# Altium PCB VFD.PcbDoc
Units mil, origin at the board's own origin, x right, y up, seen from the top; angles counter-clockwise.
Board outline 2676 x 2037 mil, 2 copper layers (Top Layer, Bottom Layer); 84 components, 86 nets, 344 pads, 273 vias.
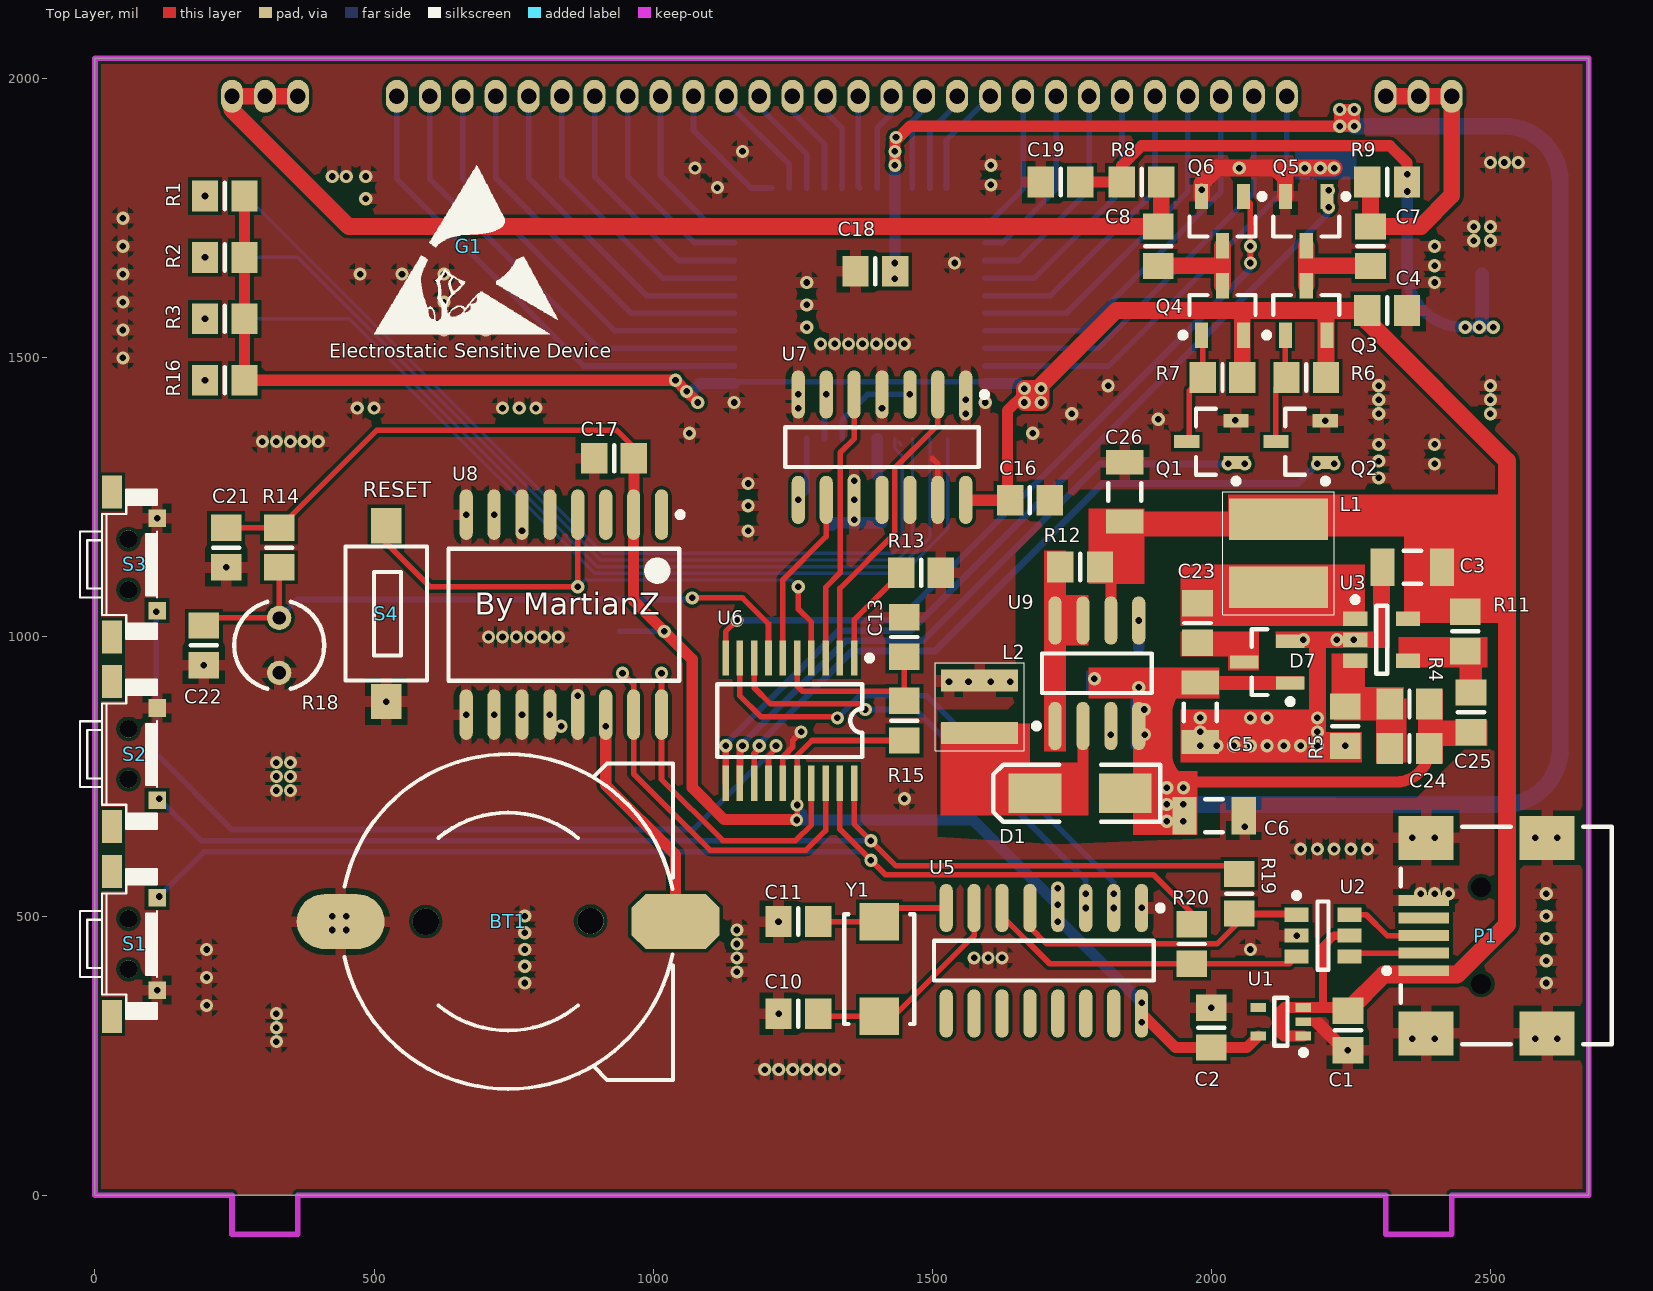
[diagram p0: Top Layer view]
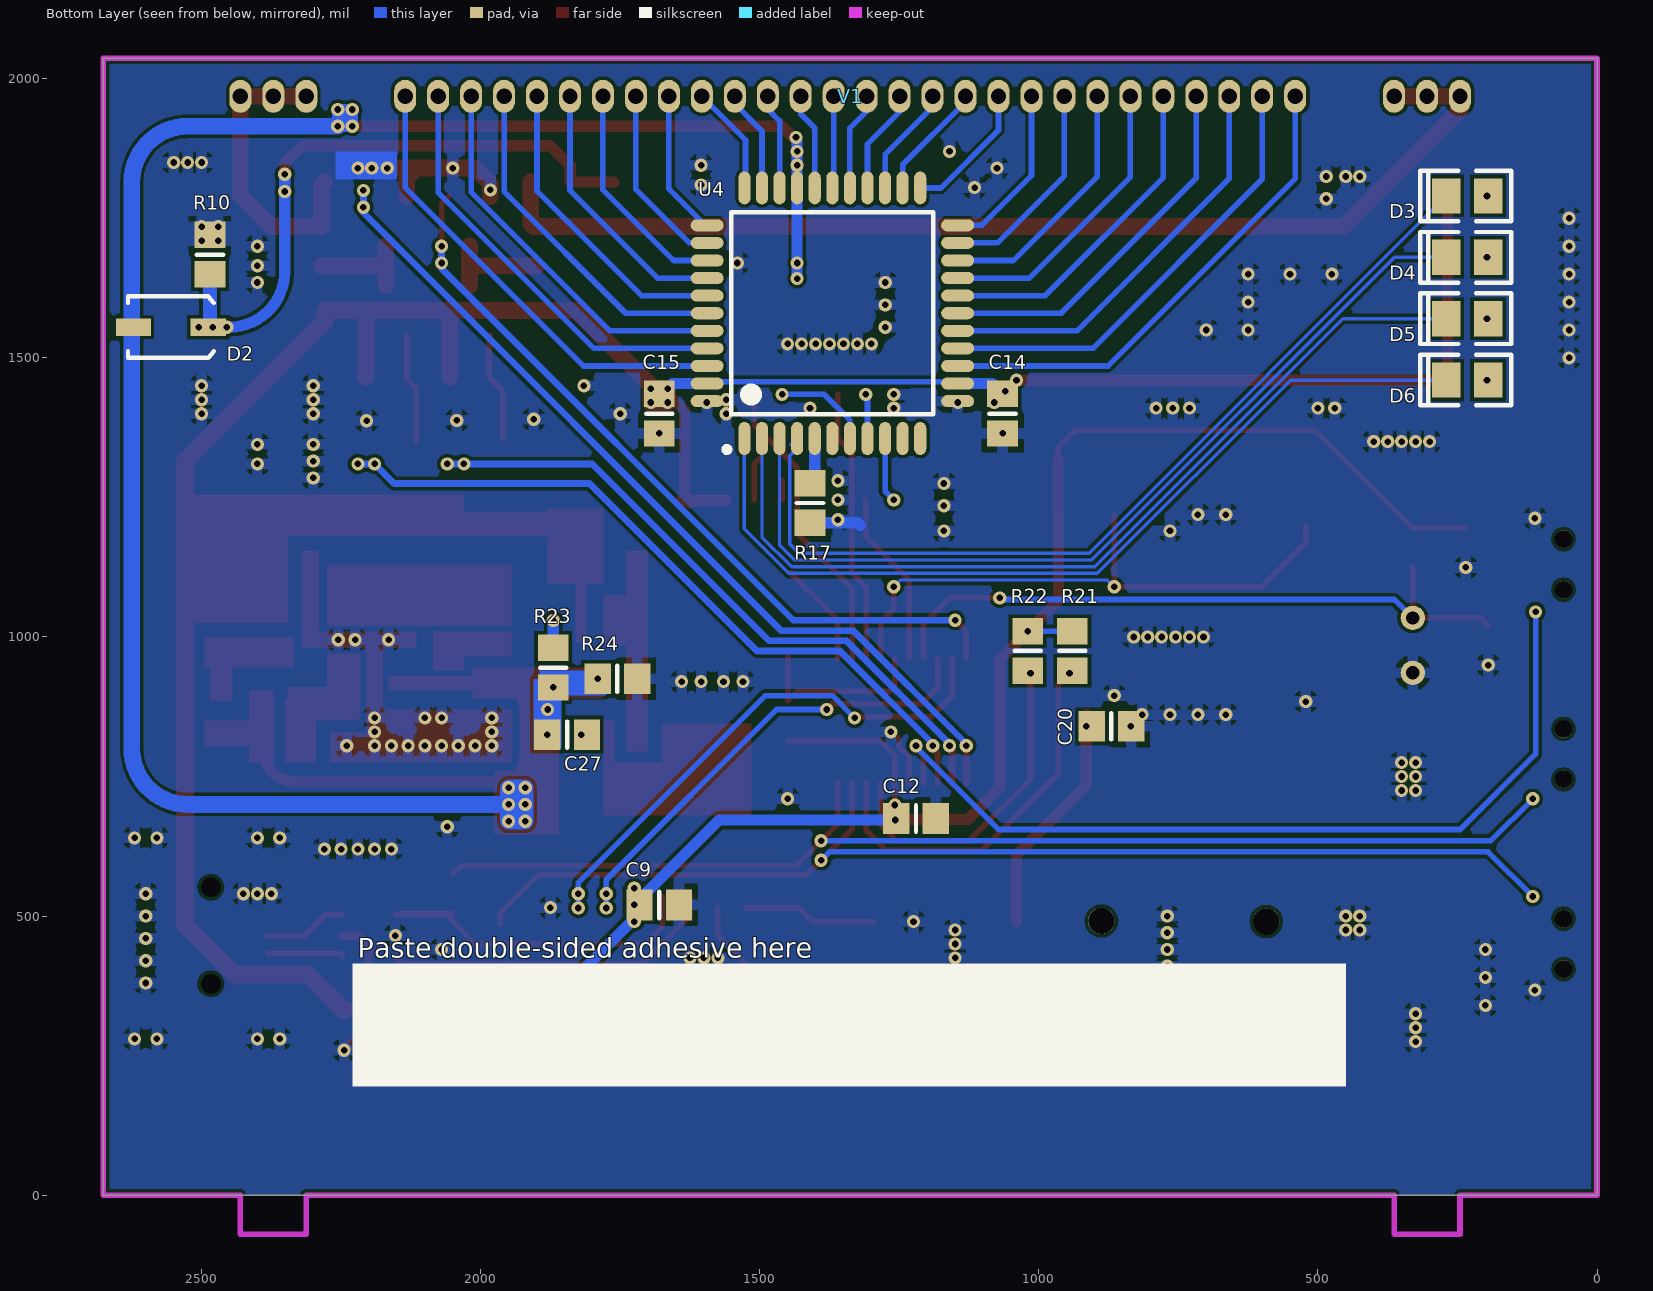
[diagram p1: Bottom Layer view, seen from below]

## Layer stack, top to bottom
Top Solder: solder mask 0.4, Solder Resist, Dk 3.5
Top Layer: signal copper 1.4
Dielectric 1: dielectric 12.6, FR-4, Dk 4.8
Bottom Layer: signal copper 1.4
Bottom Solder: solder mask 0.4, Solder Resist, Dk 3.5

## Board outline
0,0 2676,0 2676,2037 0,2037

## Design rules (kind name [scope] priority, off if disabled: settings)
Clearance [All] p1: gap=6
HoleSize [All] p1: absolutevalues=TRUE maxlimit=200 minlimit=1 maxpercent=80.000 minpercent=20.000
HoleToHoleClearance [All] p1: gap=3 allowstackedmicrovias=TRUE
MinimumSolderMaskSliver [All] p1: minsoldermaskwidth=1
MinimumSolderMaskSliver SilkscreenOverComponentPads [All] p2: minsoldermaskwidth=10
PlaneConnect [All] p1: planeconnectstyle=Relief reliefexpansion=20 reliefentries=4 reliefconductorwidth=20 reliefairgap=10
PolygonConnect [All] p1: connectstyle=Relief reliefconductorwidth=20 reliefentries=4 polygonreliefangle="90 Angle" airgapwidth=10
RoutingVias [All] p1: holewidth=28 width=50 viastyle="Through Hole" minholewidth=28 minwidth=50 maxholewidth=28 maxwidth=50
SilkToBoardRegionClearance [All] p1 off:
SilkToSilkClearance [All] p1: silktosilkclearance=0
SilkToSolderMaskClearance [IsPad] p1: minsilkscreentomaskgap=0 clearancetoexposedcopper=TRUE
SolderMaskExpansion [All] p1: expansion=4
UnpouredPolygon [All] p1: allowunpoured=FALSE
Width [All] p1: maxlimit=100 minlimit=6 preferedwidth=10
22 further rules are at their usual default settings.

## Classes and differential pairs
component class vfd_mcu: BT1 C9 C10 C11 C12 C13 C17 C18 C19 C20 C21 C22 R13 R14 R15 R18 R19 R20 R21 R22 S1 S2 S3 S4 U5 U6 U8 Y1
component class vfd_power: C1 C2 C3 C4 C5 C6 C7 C8 C23 C24 C25 C26 C27 D1 D2 D7 G1 L1 L2 P1 Q1 Q2 Q3 Q4 Q5 Q6 R4 R5 R6 R7 R8 R9 R10 R11 R12 R23 R24 U1 U2 U3 U9
component class vfd_pt6315: C14 C15 C16 D3 D4 D5 D6 R1 R2 R3 R16 R17 U4 U7 V1

## Components (designator, comment, footprint, x,y, rotation, side; value= is the part's Value field where it differs from the comment)
BT1 "Battery Holder" BAT 1040,490 r270 top
C1 "0805" 6-0805_N 2244.65,295.16 r90 top
C2 "0805" 6-0805_N 2000,300 r270 top
C3 "1206/6.3V" C1206 2360,1125 r0 top
C4 "0805" 6-0805_N 2315,1585 r180 top
C5 "1206/50V" C1206 1980,865 r270 top
C6 "1206/50V" C1206 2005,680 r0 top
C7 "0805" 6-0805_N 2285,1700 r270 top
C8 "0805" 6-0805_N 1905,1700 r270 top
C9 "0805" 6-0805_N 1680,520 r0 bottom
C10 "0805" 6-0805_N 1260,325 r0 top
C11 "0805" 6-0805_N 1260,490 r0 top
C12 "0805" 6-0805_N 1220,675 r0 bottom
C13 "0805" 6-0805_N 1450,1000 r270 top
C14 "0805" 6-0805_N 1065,1400 r90 bottom
C15 "0805" 6-0805_N 1680,1400 r90 bottom
C16 "0805" 6-0805_N 1675,1245 r180 top
C17 "0805" 6-0805_N 930,1320 r180 top
C18 "0805" 6-0805_N 1398,1655 r0 top
C19 "0805" 6-0805_N 1730,1815 r0 top
C20 "0805" 6-0805_N 870,840 r0 bottom
C21 "0805" 6-0805_N 235,1160 r90 top
C22 "0805" 6-0805_N 195,985 r90 top
C23 "0805" 6-0805_N 1975,1025 r90 top
C24 "0805" 6-0805_N 2355,800 r180 top
C25 "0805" 6-0805_N 2465,865 r270 top
C26 "1206/6.3V" C1206 1845,1260 r270 top
C27 "0805" 6-0805_N 1845,825 r0 bottom
D1 "SS36" SMA 1765,720 r180 top
D2 "MMSZ5231B" SOD-123 2555,1555 r180 bottom
D3 "0805-LED" "SMD _LED" 232.5,1790 r180 bottom
D4 "0805-LED" "SMD _LED" 232.5,1680 r180 bottom
D5 "0805-LED" "SMD _LED" 232.5,1570 r180 bottom
D6 "0805-LED" "SMD _LED" 232.5,1460 r180 bottom
D7 "BAT54S" SOT23_N 2100,955 r180 top
G1 "ESD Label" ESD 670,1700 r0 top
L1 "GDCD4532" GDCD4532 2120,1150 r270 top
L2 "GDCD3521" GDCD3521 1585,875 r270 top
P1 "MINI_USB_SM" USB/SM0.8-6H5 2690,465 r0 top
Q1 "2N7002" SOT-23 2000,1350 r180 top
Q2 "2N7002" SOT-23 2160,1350 r180 top
Q3 "SI2301" SOT-23 2170,1585 r90 top
Q4 "SI2301" SOT-23 2020,1585 r90 top
Q5 "SI2302" SOT-23 2170,1745 r270 top
Q6 "SI2302" SOT-23 2020,1745 r270 top
R1 "0805" 6-0805_N 232.5,1790 r0 top
R2 "0805" 6-0805_N 232.5,1680 r0 top
R3 "0805" 6-0805_N 232.5,1570 r0 top
R4 "0805" 6-0805_N 2355,880 r180 top
R5 "0805" 6-0805_N 2240,840 r90 top
R6 "0805" 6-0805_N 2170,1465 r180 top
R7 "0805" 6-0805_N 2020,1465 r0 top
R8 "0805" 6-0805_N 1875,1815 r180 top
R9 "0805" 6-0805_N 2315,1815 r0 top
R10 "0805" 6-0805_N 2485,1685 r270 bottom
R11 "0805" 6-0805_N 2455,1010 r270 top
R12 "0805" 6-0805_N 1765,1125.51 r180 top
R13 "0805" 6-0805_N 1480,1115 r180 top
R14 "0805" 6-0805_N 330,1160 r270 top
R15 "0805" 6-0805_N 1450,850 r90 top
R16 "0805" 6-0805_N 232.5,1460 r0 top
R17 "0805" 6-0805_N 1410,1240 r90 bottom
R18 "R4MM" R4MM 330,985 r270 top
R19 "0805" 6-0805_N 2050,540 r90 top
R20 "0805" 6-0805_N 1965,450 r90 top
R21 "0805" 6-0805_N 940,975 r90 bottom
R22 "0805" 6-0805_N 1020,975 r90 bottom
R23 "0805" 6-0805_N 1870,945 r270 bottom
R24 "0805" 6-0805_N 1755,925 r180 bottom
S1 "SW-SIDE" SW_SIDE 60,450 r90 top
S2 "SW-SIDE" SW_SIDE 60,790 r90 top
S3 "SW-SIDE" SW_SIDE 60,1130 r90 top
S4 "SW-PB" aj3X6 640,1120 r270 top
U1 "MIC5365-3.3YC5" SC70-5_N 2124.65,310.59 r180 top
U2 "USBLC6-2SC6" SOT-23_A_N 2200,465 r0 top
U3 "LT1931AES5" S5-T_N 2305,995 r0 top
U4 "PT6315" LQFP44_10X10X08P 1370,1580 r90 bottom
U5 "CH340G" SOP-16_N 1700,420 r270 top
U6 "STM32F030F4P6" TSSOP20 1245,850 r180 top
U7 "SN74LVC125AD" D014_N 1410,1340 r270 top
U8 "DS3231S(N)" WSO16_N 840,1040 r270 top
U9 "MC34063AD" 751-02_N 1795,935 r90 top
V1 "VFD" VFD48-1202FN 1338,945 r180 bottom locked
Y1 "5032" 4SMX 1405,405 r270 top

## Footprints (in the part's own frame and the unit in brackets; to place one, negate y for a bottom-side part, rotate by r counter-clockwise, add the part's x,y. Pads: shape width x height; smd on the part's side, far side on the other; paste and mask are expansions set on the pad)
4SMX [mm] "Quartz Crystal, SM; Body 5.2 x 3.4 mm (LxW max)"
  rect 1.7x1.8 smd: 1(-2.15,0) 2(2.15,0)
  silkscreen extent -2.5,-1.6 2.5,1.6
6-0805_N [mm] "Chip Resistor, Body 2.0x1.2mm, IPC Medium Density"
  rect 1.2x1.4 smd: 1(-0.9,0) 2(0.9,0)
  silkscreen extent 0,-0.6 0,0.6, body extent -1.07,-0.7 1.07,0.7, height 0.7
751-02_N [mm] "SOIC, 8-Leads, Body 4.9x3.9mm, Pitch 1.27mm, IPC Medium Density"
  oval 2.2x0.6 smd: 1(-2.4,1.905) 2(-2.4,0.635) 3(-2.4,-0.635) 4(-2.4,-1.905) 5(2.4,-1.905) 6(2.4,-0.635) 7(2.4,0.635) 8(2.4,1.905)
  silkscreen extent -2.52,-2.5 0.9,2.88, body extent -1.95,-2.45 1.95,2.45, height 1.75
aj3X6 [mm]
  rect 1.6x1.4 smd: 1(-2.012,-3.002) 2(5.988,-3.002)
  silkscreen extent -1.06,-4.85 5.04,-1.15
BAT [mm]
  oct 2.5x4 smd: 1(-0.002,0.005)
  oval 2.5x4 smd: 2(-0.002,-15.235)
  round 1.2 hole 1.2 unplated: ""(-0.027,-3.865) ""(-0.002,-11.365)
  silkscreen extent -7.62,-15.07 7.62,-0.11, body extent -6.94,-14.35 7,-0.38, height 1
C1206 [mm] "Chip Capacitor, Body 3.2x1.6mm, IPC High Density"
  rect 1.1x1.7 smd: 1(-1.35,0) 2(1.35,0)
  silkscreen extent -0.4,-0.75 0.4,0.75, body extent -1.7,-0.9 1.7,0.9, height 1.3
D014_N [mm] "SOIC, 14-Leads, Body 8.7x3.9mm, Pitch 1.27mm, IPC Medium Density"
  oval 2.2x0.6 smd: 1(-2.4,3.81) 2(-2.4,2.54) 3(-2.4,1.27) 4(-2.4,0) 5(-2.4,-1.27) 6(-2.4,-2.54) 7(-2.4,-3.81) 8(2.4,-3.81) 9(2.4,-2.54) 10(2.4,-1.27) 11(2.4,0) 12(2.4,1.27) 13(2.4,2.54) 14(2.4,3.81)
  silkscreen extent -2.52,-4.4 0.9,4.79, body extent -2,-4.38 2,4.38, height 1.75
ESD [mil]
  silkscreen extent -170,-157 159,145
GDCD3521 [mm]
  rect 1x3.5 smd: 1(-1.2,0) 2(1.2,0)
  silkscreen extent -2,-2.03 2,2.03
GDCD4532 [mm]
  rect 1.9x4.5 smd: 1(-1.55,0) 2(1.55,0)
  silkscreen extent -2.79,-2.54 2.79,2.54
LQFP44_10X10X08P [mm]
  oval 1.5x0.55 smd: 1(-5.7,4) 2(-5.7,3.2) 3(-5.7,2.4) 4(-5.7,1.6) 5(-5.7,0.8) 6(-5.7,0) 7(-5.7,-0.8) 8(-5.7,-1.6) 9(-5.7,-2.4) 10(-5.7,-3.2) 11(-5.7,-4) 23(5.7,-4) 24(5.7,-3.2) 25(5.7,-2.4) 26(5.7,-1.6) 27(5.7,-0.8) 28(5.7,0) 29(5.7,0.8) 30(5.7,1.6) 31(5.7,2.4) 32(5.7,3.2) 33(5.7,4)
  oval 0.55x1.5 smd: 12(-4,-5.7) 13(-3.2,-5.7) 14(-2.4,-5.7) 15(-1.6,-5.7) 16(-0.8,-5.7) 17(0,-5.7) 18(0.8,-5.7) 19(1.6,-5.7) 20(2.4,-5.7) 21(3.2,-5.7) 22(4,-5.7) 34(4,5.7) 35(3.2,5.7) 36(2.4,5.7) 37(1.6,5.7) 38(0.8,5.7) 39(0,5.7) 40(-0.8,5.7) 41(-1.6,5.7) 42(-2.4,5.7) 43(-3.2,5.7) 44(-4,5.7)
  silkscreen extent -6.32,-4.6 4.6,4.93
R4MM [mm]
  round 1.1 hole 0.6: 1(-1.25,0) 2(1.25,0)
  silkscreen extent -1.98,-2.05 1.98,2.05
S5-T_N [mm] "SOT23, 5-Leads, Body 3x1.6mm, Pitch 0.95mm, Lead Span 2.8mm, IPC Medium Density"
  rect 1.1x0.65 smd: 1(-1.2,0.95) 2(-1.2,0) 3(-1.2,-0.95) 4(1.2,-0.95) 5(1.2,0.95)
  silkscreen extent -1.32,-1.55 0.25,1.95, body extent -0.9,-1.55 0.9,1.55, height 1
SC70-5_N [mm] "SOT353, 5-Leads, Body 2x1.3mm, Pitch 0.65mm, Lead Span 2.1mm, IPC Medium Density"
  rect 0.7x0.4 smd: 1(-1.025,0.65) 2(-1.025,0) 3(-1.025,-0.65) 4(1.025,-0.65) 5(1.025,0.65)
  silkscreen extent -1.15,-1.1 0.3,1.52, body extent -0.7,-1.1 0.7,1.1, height 1.1
SMA [mm] "DO-214-AC/SMA; 2 C-Bend Leads; Body 5 x 2.7 mm, inc. leads (LxW)"
  rect 2.4x1.8 smd: 1(-2.05,0) 2(2.05,0)
  silkscreen extent -3.65,-1.3 3.95,1.3
"SMD _LED" [mm]
  rect 1.3x1.6 smd: 1(0.948,0.006) 2(-0.952,0.006)
  silkscreen extent -2.13,-1.14 2,1.16, body extent -1.52,-0.64 1.52,0.64, height 1.27
SOD-123 [mm] "SOD-123; 2 Leads; Body 2.7 x 1.6 mm, (LxW)"
  rect 1.6x0.8 smd: 1(-1.7,0) 2(1.7,0)
  silkscreen extent -1.95,-1.4 1.95,1.4
SOP-16_N [mm] "16-Pin Small Outline Integrated Circuit 1.27 mm Pitch, IPC Medium Density"
  oval 2.2x0.6 smd: 1(-2.4,4.445) 2(-2.4,3.175) 3(-2.4,1.905) 4(-2.4,0.635) 5(-2.4,-0.635) 6(-2.4,-1.905) 7(-2.4,-3.175) 8(-2.4,-4.445) 9(2.4,-4.445) 10(2.4,-3.175) 11(2.4,-1.905) 12(2.4,-0.635) 13(2.4,0.635) 14(2.4,1.905) 15(2.4,3.175) 16(2.4,4.445)
  silkscreen extent -2.52,-5 0.9,5.42, body extent -1.95,-4.95 1.95,4.95, height 1.5
SOT23_N [mm] "SOT23, 3-Leads, Body 2.9x1.3mm, Pitch 0.95mm, Lead Span 2.3mm, IPC Medium Density"
  rect 1.3x0.6 smd: 1(-1.05,0.95) 2(-1.05,-0.95) 3(1.05,0)
  silkscreen extent -1.18,-1.5 0.7,1.92, body extent -0.7,-1.5 0.7,1.5, height 1.1
SOT-23 [mm] "SOT23, 3-Leads, Body 2.9x1.3mm, Pitch 0.95mm, Lead Span 2.4mm, IPC Medium Density"
  rect 1.15x0.6 smd: 1(-1.125,0.95) 2(-1.125,-0.95) 3(1.125,0)
  silkscreen extent -1.25,-1.5 0.7,1.92, body extent -0.7,-1.5 0.7,1.5, height 1.14
SOT-23_A_N [mm] "SOT23, 6-Leads, Body 2.9x1.7mm, Pitch 0.95mm, Lead Span 2.8mm, IPC Medium Density"
  rect 1.1x0.65 smd: 1(-1.2,0.95) 2(-1.2,0) 3(-1.2,-0.95) 4(1.2,-0.95) 5(1.2,0) 6(1.2,0.95)
  silkscreen extent -1.32,-1.55 0.25,1.95, body extent -0.9,-1.55 0.9,1.55, height 1.45
SW_SIDE [mm]
  round 0.8 hole 0.8 unplated: 0(-1.15,0) 0(1.15,0)
  rect 0.8x0.8 smd: 1(-2.1,-1.3) 2(2.1,-1.3)
  rect 1.5x0.9 smd: 3(-3.3,0.75) 4(3.3,0.75)
  silkscreen extent -3.42,-1.3 3.42,2.2
TSSOP20 [mm] "Shrink Small Outline; 20 Leads; Body Width 4.4 mm; Pitch 0.65 mm"
  rect 0.3x1.6 smd: 1(-2.925,-2.85) 2(-2.275,-2.85) 3(-1.625,-2.85) 4(-0.975,-2.85) 5(-0.325,-2.85) 6(0.325,-2.85) 7(0.975,-2.85) 8(1.625,-2.85) 9(2.275,-2.85) 10(2.925,-2.85) 11(2.925,2.85) 12(2.275,2.85) 13(1.625,2.85) 14(0.975,2.85) 15(0.325,2.85) 16(-0.325,2.85) 17(-0.975,2.85) 18(-1.625,2.85) 19(-2.275,2.85) 20(-2.925,2.85)
  silkscreen extent -3.75,-2.97 3.3,1.65
USB/SM0.8-6H5 [mm] "Connector; USB2.0, Type B, SM; 5 Position; Right Angle"
  rect 2.3x0.5 smd: 1(-7.85,-1.6) 2(-7.85,-0.8) 3(-7.85,0) 4(-7.85,0.8) 5(-7.85,1.6)
  rect 2.5x2 smd: 6(-7.75,4.45) 7(-2.25,4.45) 8(-7.75,-4.45) 9(-2.25,-4.45)
  round 0.6 hole 0.9 unplated: MH1(-5.25,2.2) MH2(-5.25,-2.2)
  silkscreen extent -9.67,-4.95 0.7,4.95, body extent -8.9,-4.95 0.7,4.95, height 3.9
VFD48-1202FN [mm]
  oval 1x1.5 hole 0.7: 1(-27.75,26) 2(-26.25,26) 3(-24.75,26) 4(-20.25,26) 5(-18.75,26) 6(-17.25,26) 7(-15.75,26) 8(-14.25,26) 9(-12.75,26) 10(-11.25,26) 11(-9.75,26) 12(-8.25,26) 13(-6.75,26) 14(-5.25,26) 15(-3.75,26) 16(-2.25,26) 17(-0.75,26) 18(0.75,26) 19(2.25,26) 20(3.75,26) 21(5.25,26) 22(6.75,26) 23(8.25,26) 24(9.75,26) 25(11.25,26) 26(12.75,26) 27(14.25,26) 28(15.75,26) 29(17.25,26) 30(18.75,26) 31(20.25,26) 32(24.75,26) 33(26.25,26) 34(27.75,26)
  body extent -34,-24 34,24, height 20
WSO16_N [mm] "SOIC, 16-Leads, Body 10.3x7.5mm, Pitch 1.27mm, IPC Medium Density"
  oval 2.3x0.6 smd: 1(-4.55,4.445) 2(-4.55,3.175) 3(-4.55,1.905) 4(-4.55,0.635) 5(-4.55,-0.635) 6(-4.55,-1.905) 7(-4.55,-3.175) 8(-4.55,-4.445) 9(4.55,-4.445) 10(4.55,-3.175) 11(4.55,-1.905) 12(4.55,-0.635) 13(4.55,0.635) 14(4.55,1.905) 15(4.55,3.175) 16(4.55,4.445)
  silkscreen extent -4.67,-5.25 3,5.42, body extent -3.75,-5.15 3.75,5.15, height 2.65

## Part data
BT1: library part Battery, "Multicell Battery"
C1 C2 C3 C4 C5 C6 C7 C8 C10 C11 C13 C17 C23 C24 C25 C26 C27: library part Cap, "Capacitor"
C9 C12 C14 C15 C16 C18 C19 C20 C21 C22: library part CAP, "Capacitor"
D1: library part "D Schottky", "Schottky Diode"
D2: library part "D Zener", "Zener Diode"
D3 D4 D5 D6: library part HSMX-C670_1, "Typical RED GaAs SMD LED Agilent make"
D7: "Schottky Barrier Double Diode"
G1: library part g固定过孔
L1 L2: library part Inductor, "Inductor"
Q1 Q2: "N-channel Enhancement Mode Field-effect Transistor"
Q3 Q4: library part PMOS-2, "P-Channel Power MOSFET"
Q5 Q6: library part NMOS-2, "N-Channel Power MOSFET"
R1 R2 R3 R4 R5 R6 R7 R8 R9 R10 R11 R12 R13 R15 R16 R17 R21 R22 R23 R24: library part Res1, "Resistor"
R14 R18 R19 R20: library part res1, "Resistor"
S1 S2 S3: library part SW-PB, "Switch"
S4: "Switch"
U1: library part LP2985AIM5-3.3/NOPB, "Micropower 150 mA Low-Noise Ultra Low-Dropout Regulator, 5-pin SOT-323, Pb-Free"
U2: library part Component_1
U3: "2.2MHz Inverting Current Mode DC/DC Converter"
U7: "Quadruple Bus Buffer Gate with 3-State Outputs"
U8: library part DS3231
U9: "DC-to-DC Converter Control Circuit"
V1: library part VFD48-1202FN, "VFD48-1202FN"
Y1: library part XTAL, "Crystal Oscillator"

## Via types
v1: diameter 23.62, hole 11.81, Top Layer to Bottom Layer, tented both sides, 273 vias

## Nets (pads, with @x,y where several pads share a name; then routed paths per layer and width w, separated by ;. In a path a pad name is that pad's centre, name@x,y a point inside that pad or via, vN(x,y) a via of type N, cw(c..) or ccw(c..) an arc to the next point about the centre after c; other vN are vias at no path point)
3.3V: C2.2 C9.2 C12.2 C17.1 C21.2 R14.1 R15.1 R21.2 R22.2 U1.5 U5.4 U5.16 U6.16 U8.2 | length 3165.5
  Top Layer w10: C21.2 R14.1 504.57,1370 935,1370 965.43,1339.57 C17.1 ; v1@1257.8,672.8 v1(1257.8,699) U6.16 1257.8,787.8 1284.57,814.57 R15.1
  Top Layer w20: C17.1 965.43,1219.57 U8.2 965,1065 1070,960 1070,730 1127.2,672.8 v1@1257.8,672.8 ; U5.16 1935.95,264.57 C2.2 2063.86,264.57 U1.5
  Bottom Layer w10: R21.2 R22.2
  Bottom Layer w20: v1(1257,672) 1573,672 v1(1725,520) ; C12.2@1259,675 C12.2@1266.8,682.8 ; v1(1725,550) v1(1725,520) ; v1(1875,310) v1(1875,345) 1725,495 v1(1725,520)
  other v1: 1725,490 1020,1010
5V: C1.2 C3.2 C4.2 C14.2 C15.2 C16.2 C26.2 L1.1 P1.1 Q3.2 Q4.2 R1.2 R2.2 R3.2 R6.1 R7.2 R11.1 R12.1 R16.2 U1.1 U1.3 U2.5 U3.5 U4.13 U4.43 U7.14 U9.6 | length 5018
  Top Layer w15: 2200,336.18 2200,445 2220,465 U2.5
  Top Layer w20: R16.2@260,1460 v1(1040,1460) v1(1060,1440) v1(1080,1420) ; R16.2 R3.2 R2.2 R1.2 ; U7.14 1560.51,1245 C16.2@1630,1245 ; C16.2@1625,1240 C16.2@1630,1245 ; C16.2 C16.2@1630,1245 ; v1@1665,1435.43 1635,1405.43 1635,1250 C16.2@1630,1245 ; U1.1 2130,285 2125,290 2125,320 2120,325 2131.18,336.18 U1.3 2200,336.18 2239.06,336.18 C1.2
  Top Layer w30: 1680,1435.43 v1@1689.57,1445 ; R7.2 2055.43,1584.57 ; R6.1 2205.43,1580.43 2210,1585 ; C4.2@2279.57,1565.43 C4.2 2210,1585 ; v1@1689.57,1445 v1(1695,1445) ; v1@1689.57,1445 v1(1665,1445) 1665,1435.43 v1(1665,1420) v1(1695,1420) v1(1695,1445) ; v1@1689.57,1445 v1@1692.28,1447.72 ; v1@1692.28,1447.72 1829.57,1585 2125,1585 2210,1585 ; v1@1692.28,1447.72 v1(1695,1445)
  Top Layer w32: C1.2 2309.05,395 2440,395 2530,485 2530,1315 C4.2@2279.57,1565.43
  Bottom Layer w10: U4.13@1145.59,1457.3 1594.41,1457.3 U4.43 ; C15.2@1655.98,1454.02 v1(1665,1445)
  Bottom Layer w20: C14.2 1083.58,1454.02 U4.13 ; U4.43 C15.2@1655.98,1454.02
32KHZ: U8.1
6315_DOUT: U4.6
-20V: C19.2 D2.2 R8.2 R9.2 R10.2 | length 1146.4
  Top Layer w20: C19.2@1761.43,1814 1762.43,1815 R8.2 1839.57,1844.57 1875,1880 2320,1880 2350.43,1849.57 R9.2
  Bottom Layer w20: v1(2351,1829) v1(2351,1798) 2351,1655 ccw(c2451,1655) 2451,1555 v1(2455,1555) v1(2480,1555) D2.2
  Bottom Layer w25: v1(2480,1555) ccw(c2480,1560) 2485,1560 R10.2
  other v1: 2505,1555
-25V: C5.1 C6.1 C18.2 C24.1 C25.2 C27.2 D1.1 D2.1 D7.1 R4.1 R23.2 R24.1 U4.30 U9.4 | length 4753.8
  Top Layer w10: C5.1@1963.15,918.15 C5.1 ccw(c1980,863.15) 1925,863.15 1925,790 ccw(c1975,790) 1975,740
  Top Layer w20: v1(1432.99,1845) 1432.99,1887.99 1460,1915 v1(2230,1915) ; 1975,740 2330.43,740 ccw(c2330.43,800) C24.1 ; v1(2230,1915) v1(2255.94,1915) ; v1(2230,1915) v1(2230,1945) ; v1(2230,1945) 2241.1,1932.17 2244.84,1927.83 v1(2255.94,1915) ; v1(2230,1945) v1(2255.94,1945) v1(2255.94,1915)
  Bottom Layer w20: v1(1432.99,1642) U4.30 v1(1432.99,1845) v1(1432.99,1870) v1@1432.99,1887.99 ; v1@2227.58,1942.5 v1@2230,1940.15 ; 2525,1915 2520,1915 cw(c2520,1790) 2565.63,1906.37 ; v1@2230,1940.15 2240.95,1929.54 2242.57,1927.96 v1(2255.94,1915) ; v1@2230,1940.15 v1(2230,1945) ; v1@2230,1940.15 v1(2230,1915) v1(2255.94,1915) ; v1(2230,1945) 2241.1,1932.17 2244.84,1927.83 v1(2255.94,1915) ; v1(2230,1945) v1(2255.94,1945) v1(2255.94,1915)
  Bottom Layer w30: v1(2255.94,1915) 2520,1915 ; 2525,1915 cw(c2525,1815) 2565.63,1906.38 ; v1(1920,700) cw(c1950,700) 1935,725.98 ; v1(1920,700) v1(1920,730) ; v1(1920,700) v1(1920,670) v1(1950,670) v1(1950,700) ; v1(1920,730) cw(c1920,700) 1935,725.98 ; v1(1920,730) v1(1950,730) ; 1935,725.98 cw(c1950,700) v1(1950,730) ; 1935,725.98 cw(c1920,700) v1(1950,700) ; v1(1950,700) 2525,700 ccw(c2525,800) 2625,800 2625,1815 ; v1(1950,700) v1(1950,730) ; 2565.63,1906.37 cw(c2525,1815) 2625,1815 ; 2565.63,1906.37 cw(c2525,1815) 2625,1815
  other v1: 1880.43,825 1880,870 1870,909.57 1790.43,925 1432.99,1670 1435,1895
BATTERY: BT1.1 C20.2 U8.14 | length 422.6
  Top Layer w20: U8.14 915,735 1040.2,609.8 BT1.1
  other v1: 915,840
CH1: Q2.1 U6.13 | length 1312.3
  Top Layer w10: U6.13 1181.02,791.02
  Top Layer w12: 1181.02,791.02 1190,800 v1(1190,805)
  Bottom Layer w12: v1(1190,805) 1190,808.67 1356.33,975 1505,975 1805,1275 2155,1275 v1(2190,1310) v1(2220,1310)
CH2: Q1.1 U6.12 | length 1180.4
  Top Layer w12: U6.12 1155.43,800.43 v1(1160,805)
  Bottom Layer w12: v1(1160,805) 1160,808.67 1344.33,993 1483,993 1800,1310 v1(2060,1310)
  other v1: 2030,1310
CH3: Q5.1 U6.11 | length 1585
  Top Layer w10: v1@1129.84,804.84 v1(1130,805)
  Top Layer w12: U6.11 v1@1129.84,804.84
  Bottom Layer w12: v1(1130,805) 1130,808.67 1332.33,1011 1461,1011 2210,1760 v1(2210,1770) v1(2210,1800)
CH4: Q6.1 U6.10 | length 1411.6
  Top Layer w10: U6.10 1129.84,1009.84 v1(1150,1030) ; Q6.1 2070,1776.69 v1(2070,1700) v1@2070,1680
  Bottom Layer w10: v1(2070,1670) v1@2070,1680
  Bottom Layer w12: v1(1150,1030) 1440,1030 2070,1660 v1(2070,1670) ; v1@2070,1680 v1(2070,1700)
COM1_RXD: U5.3 U6.8 | length 840.2
  Top Layer w10: U6.8 1181.02,908.98 1210,880 1370,880 v1(1380,870)
  Bottom Layer w10: v1(1380,870) 1470,870 1775,565 v1(1775,514.49)
  other v1: 1775,540
COM1_TXD: U5.2 U6.9 | length 960.7
  Top Layer w10: U6.9@1155,961.77 U6.9 1155.43,894.57 1192.81,857.19 1332.81,857.19 1330.62,855 v1(1330,855)
  Bottom Layer w10: v1(1330,855) 1370,895 1490,895 1825,560 v1(1825,540) v1(1825,514.49)
DS3231_SCL: R22.1 U6.17 U8.16 | length 630.1
  Top Layer w10: 1015,800 U8.16 v1(1015,935) ; U8.16@1015,840 1015,745 1125,635 1255,635 1283.39,663.39 U6.17
DS3231_SDA: R21.1 U6.18 U8.15 | length 737.3
  Top Layer w10: v1(945,935) 965,915 U8.15 ; 965,800 965,855 965,755 1101.88,618.12 1274.13,618.12 1308.98,652.98 U6.18
F1: C7.1 R9.1 V1.1 V1.2 V1.3 | length 546.4
  Top Layer w30: R9.1 2285,1809.57 C7.1 2375.43,1735.43 2430.52,1790.52 V1.1 V1.2 V1.3
F2: C8.1 R8.1 V1.32 V1.33 V1.34 | length 1970.2
  Top Layer w30: V1.32 V1.34 245.48,1944.52 454.57,1735.43 C8.1 1910.43,1740.86 R8.1
GND: BT1.2 C1.1 C2.1 C3.1 C4.1 C5.2 C6.2 C9.1 C10.1 C11.1 C12.1 C13.1 C14.1 C15.1 C16.1 C17.2 C18.1 C19.1 C20.1 C21.1 C22.1 C26.1 D7.2 L2.1 P1.5 P1.6 P1.7 P1.8 P1.9 Q1.2 Q2.2 Q5.2 Q6.2 R5.1 R10.1 R13.1 R17.1 R18.2 R24.2 S1.1 S2.2 S3.2 S4.2 U1.2 U2.2 U3.2 U4.12 U4.44 U5.1 U6.15 U7.1 U7.4 U7.7 U7.10 U7.12 U7.13 U8.5 U8.6 U8.7 U8.8 U8.9 U8.10 U8.11 U8.12 U8.13 | length 820.4
  Top Layer w10: U6.15 1232.2,784.83 1250,802.63 1250,815 v1(1265,830) ; U7.12 U7.12@1460,1280 ; 1500,1320 1510,1310 U7.13 ; U1.2 2179.41,310.59 2225,265 C1.1@2239.37,265
  Top Layer w15: 2179.41,310.59 2193.78,310.59 v1(2244.65,259.73)
  Top Layer w30: Q6.2 1982.6,1812.6 2010,1840 2115,1840 ; Q5.2 2132.6,1822.4 2115,1840 ; v1(2220,1840) 2115,1840
  Bottom Layer w20: 1320,1200 1324.57,1204.57 R17.1
  other v1: 1200,225 1225,225 1250,225 1275,225 1300,225 1325,225 325,275 2360,280 2400,280 2580,280 2620,280 325,300 325,325 1225,325 2000,335.43 200,340 111.18,367.32 770,380 2600,380 200,390 1150,400 770,410 2600,420 1150,425 1575,425 1600,425 1625,425 200,440 770,440 2070,440 1150,450 2600,460 2152.76,465 770,470 425,475 450,475 1150,475 1224.57,490 425,500 450,500 770,500 2600,500 1875,515.06 2375,540 2400,540 2425,540 2600,540 2160,620 2190,620 2220,620 2250,620 2280,620 2360,640 2400,640 2580,640 2620,640 2060,660 1450,710 325,725 350,725 325,750 350,750 325,775 350,775 1980,805 2010,805 2040,805 2070,805 2100,805 2130,805 2160,805 2190,805 2240,805 1980,830 2190,830 835,840 1980,855 2070,855 2100,855 2190,855 665,860.87 715,860.87 765,860.87 815,860.87 521.8,884.27 865,895 1530,920 1565,920 1605,920 1640,920 195,949.57 2165,995 2225,995 2255,995 705,1000 730,1000 755,1000 780,1000 805,1000 830,1000 235,1124.57 765,1190 1170,1190 1360,1210 111.18,1212.68 665,1219.13 715,1219.13 1170,1235 1360,1245.51 1170,1275 1360,1280 2300,1285 2400,1310 2300,1315 2300,1345 2400,1345 300,1350 325,1350 350,1350 375,1350 400,1350 1065,1365 1680,1365 2204.29,1387.4 2043,1388 1905,1390 1560,1400 1750,1400 2300,1400 2500,1400 470,1410 500,1410 730,1410 760,1410 790,1410 1260,1410 1410,1410 1145,1420 1595,1420 1560,1425 2300,1425 2500,1425 1260,1434.49 1815,1450 2300,1450 2500,1450 50,1500 1300,1525 1325,1525 1350,1525 1375,1525 1400,1525 1425,1525 1450,1525 50,1550 625,1550 700,1550 1275,1555 1275,1595 50,1600 625,1600 1275,1635 2400,1635 50,1650 475,1650 550,1650 625,1650 2400,1665 1540,1670 50,1700 2400,1700 2470,1710 2500,1710 2470,1735 2500,1735 50,1750 485,1785 1982.6,1800.95 1115,1805 1605,1810 425,1825 450,1825 485,1825 1075,1840 2050,1840 2167.5,1840 2195,1840 1605,1845 2500,1850 2525,1850 2550,1850 1160,1870
NetC7_2: C7.2 Q3.3 Q5.3 | length 186.6
  Top Layer w30: Q3.3 2170,1665 ; Q5.3 2170,1665 ; C7.2 2284.57,1665 2170,1665
NetC8_2: C8.2 Q4.3 Q6.3 | length 191.6
  Top Layer w30: C8.2@1900,1664.57 1900.43,1665 2020,1665 ; Q4.3 2020,1665 ; Q6.3 2020,1665
NetC10_2: C10.2 U5.7 Y1.2 | length 390.9
  Top Layer w10: C10.2 1300.08,320.35 Y1.2 1430.35,320.35 1575,465 U5.7
NetC11_2: C11.2 U5.8 Y1.1 | length 240
  Top Layer w10: C11.2 1404.65,490 Y1.1 1429.84,514.49 U5.8
NetC23_1: C23.1 D7.3
NetC23_2: C23.2 L1.2 U3.1
NetC24_2: C24.2 R4.2 R5.2 U3.3
NetC25_1: C25.1 R11.2 U3.4
NetC27_1: C27.1 U9.3
  other v1: 1820,825
NetD1_2: D1.2 L2.2 U9.2
NetD3_1: D3.1 R1.1
  other v1: 197.07,1790
NetD3_2: D3.2 U4.4 | length 1650.1
  Bottom Layer w6: D3.2@269.78,1790.22 910,1150 1430,1150 1446.56,1166.56 1446.56,1324.88 1432.99,1338.45 U4.4 ; U4.4@1440,1348.58 1444.66,1343.92
NetD4_1: D4.1 R2.1
  other v1: 197.07,1680
NetD4_2: D4.2 U4.3 | length 1621.2
  Bottom Layer w6: D4.2 362.81,1680.22 905.03,1138 1438,1138 1464.49,1164.49 U4.3
NetD5_1: D5.1 R3.1
  other v1: 197.07,1570
NetD5_2: D5.2 U4.2 | length 1608.5
  Bottom Layer w6: D5.2 455.84,1570.22 900.06,1126 1442.97,1126 1495.98,1179.01 U4.2
NetD6_1: D6.1 R16.1
  other v1: 197.07,1460
NetD6_2: D6.2 U4.1 | length 1595.9
  Bottom Layer w6: D6.2 548.87,1460.22 895.09,1114 1447.94,1114 1527.48,1193.54 U4.1
NetP1_2: P1.2 U2.4 | length 136.1
  Top Layer w10: U2.4 2253.15,433.5 P1.2
NetP1_3: P1.3 U2.6 | length 174.2
  Top Layer w10: U2.6 2277.6,502.4 2315,465 P1.3@2360,465 ; 2335,465 P1.3@2360,465 ; P1.3 P1.3@2360,465
NetQ1_3: Q1.3 Q4.1 R7.1 | length 196.4
  Top Layer w10: Q1.3@1960.71,1355 1960.71,1441.14 R7.1 1984.57,1538.74 Q4.1
NetQ2_3: Q2.3 Q3.1 R6.2 | length 199.3
  Top Layer w10: Q2.3 2115.71,1446.14 R6.2 2132.6,1466.97 Q3.1
NetR12_2: R12.2 U9.1 U9.7 U9.8
NetR13_2: R13.2 U6.1 | length 187.8
  Top Layer w10: U6.1 1360.16,1030.59 R13.2
NetR17_2: R17.2 U4.5 | length 66.1
  Bottom Layer w20: R17.2@1401.5,1289.45 U4.5
NetR23_1: R23.1 U9.5 | length 49.1
  Bottom Layer w20: R23.1 v1(1870,1029.49)
NetU4_7: U4.7 U7.3 | length 173.5
  Bottom Layer w10: U4.7 1338.5,1388.5 1384.49,1434.49 v1(1460,1434.49)
NetU4_8: U4.8 U7.6 | length 80.1
  Bottom Layer w10: U4.8 1307.01,1431.5 v1(1310,1434.49)
NetU4_9: U4.9 U7.8 | length 116.5
  Bottom Layer w10: v1(1260,1245.51) 1275.51,1261.02 U4.9
NetU4_14: U4.14 V1.31 | length 891.6
  Bottom Layer w10: V1.31 540.76,1820.76 876,1485.51 U4.14
NetU4_15: U4.15 V1.30 | length 819.8
  Bottom Layer w10: V1.30 599.81,1820.19 902.99,1517.01 U4.15
NetU4_16: U4.16 V1.29 | length 747.1
  Bottom Layer w10: V1.29 658.87,1821.13 931.5,1548.5 U4.16
NetU4_17: U4.17 V1.28 | length 674.5
  Bottom Layer w10: V1.28 717.92,1822.08 960,1580 U4.17
NetU4_18: U4.18 V1.27 | length 601.8
  Bottom Layer w10: V1.27 776.98,1823.02 988.5,1611.5 U4.18
NetU4_19: U4.19 V1.26 | length 529.2
  Bottom Layer w10: V1.26 836.03,1823.97 1017.01,1642.99 U4.19
NetU4_20: U4.20 V1.25 | length 456.5
  Bottom Layer w10: V1.25 895.09,1824.91 1045.51,1674.49 U4.20
NetU4_21: U4.21 V1.24 | length 383.9
  Bottom Layer w10: V1.24 954.14,1825.86 1074.02,1705.98 U4.21
NetU4_22: U4.22 V1.23 | length 311.2
  Bottom Layer w10: V1.23 1013.2,1826.8 1102.52,1737.48 U4.22
NetU4_23: U4.23 V1.22 | length 243.9
  Bottom Layer w10: V1.22 1072.25,1907.75 1175.59,1804.41 U4.23
NetU4_24: U4.24 V1.21 | length 221
  Bottom Layer w10: V1.21@1141.38,1968.62 V1.21 1131.31,1958.69 1244.02,1845.98 U4.24
NetU4_25: U4.25 V1.20 | length 199.5
  Bottom Layer w10: V1.20 1190.36,1949.64 1275.51,1864.49 U4.25
NetU4_26: U4.26 V1.19 | length 188.1
  Bottom Layer w10: V1.19 1249.42,1940.58 1307.01,1882.99 U4.26
NetU4_27: U4.27 V1.18 | length 183.7
  Bottom Layer w10: V1.18 1300,1960.15 1300,1950 1338.5,1911.5 U4.27
NetU4_28: U4.28 V1.17 | length 165.2
  Bottom Layer w10: V1.17 1367.53,1806.88 U4.28
NetU4_29: U4.29 V1.16 | length 174.6
  Bottom Layer w10: U4.29 1401.5,1911.5 1426.58,1936.58 V1.16
NetU4_31: U4.31 V1.15 | length 173
  Bottom Layer w10: U4.31 1464.49,1924.49 1485.64,1945.64 V1.15
NetU4_32: U4.32 V1.14 | length 184.4
  Bottom Layer w10: U4.32 1495.98,1905.98 1544.69,1954.69 V1.14
NetU4_33: U4.33 V1.13 | length 196.6
  Bottom Layer w10: U4.33@1525.48,1804.41 1525.48,1890.36 V1.13
NetU4_34: U4.34 V1.12 | length 261.3
  Bottom Layer w10: U4.34 1597.48,1737.48 1662.8,1802.8 V1.12
NetU4_35: U4.35 V1.11 | length 333.9
  Bottom Layer w10: U4.35 1625.98,1705.98 1721.86,1801.86 V1.11
NetU4_36: U4.36 V1.10 | length 406.6
  Bottom Layer w10: U4.36 1654.49,1674.49 1780.91,1800.91 V1.10
NetU4_37: U4.37 V1.9 | length 479.2
  Bottom Layer w10: U4.37 1682.99,1642.99 1839.97,1799.97 V1.9
NetU4_38: U4.38 V1.8 | length 551.9
  Bottom Layer w10: U4.38 1711.5,1611.5 1899.02,1799.02 V1.8
NetU4_39: U4.39 V1.7 | length 624.5
  Bottom Layer w10: U4.39 1740,1580 1958.08,1798.08 V1.7
NetU4_40: U4.40 V1.6 | length 697.2
  Bottom Layer w10: U4.40 1768.5,1548.5 2017.13,1797.13 V1.6
NetU4_41: U4.41 V1.5 | length 769.9
  Bottom Layer w10: U4.41 1797.01,1517.01 2076.19,1796.19 V1.5
NetU4_42: U4.42 V1.4 | length 836.7
  Bottom Layer w10: U4.42 1815.51,1485.51 2135.24,1805.24 V1.4
NRST: S4.1 U6.4 U8.4 | length 1078.2
  Top Layer w10: S4.1 521.8,1168.2 600,1090 v1(865,1090) U8.4 ; v1(1260,1090) 1260,1050 1283.39,1026.61 U6.4
  Bottom Layer w6: v1(865,1090) 877,1102 1248,1102 v1(1260,1090)
PA1: C22.2 R14.2 R18.1 U6.7 | length 1201.8
  Top Layer w10: C22.2 208.78,1034.21 R18.1 R14.2 ; v1(1070,1070) 1160,1070 1206.61,1023.39 U6.7
  Bottom Layer w10: R18.1 362.98,1067.19 v1@1070,1067.19
PB1: S3.1 U6.14 | length 1557.1
  Top Layer w10: U6.14 1206.61,786.61 1220,800 v1(1220,805)
  Bottom Layer w10: v1(110,1045) 110,790 245,655 1072.26,655 1220,802.74 v1(1220,805)
PT6315_CLK: U6.3 U7.5 | length 493.4
  Top Layer w10: U6.3 1308.98,1088.98 1335,1115 1335,1330 1360,1355 U7.5
PT6315_DIN: U6.2 U7.2 | length 545.6
  Top Layer w10: U6.2@1335,962.64 U6.2 1334.57,1086.94 1432.81,1185.18 1432.81,1302.81 1510,1380 U7.2
PT6315_STB: U6.6 U7.9 | length 315.5
  Top Layer w10: U6.6 1232.2,1102.2 1310,1180 U7.9
SWCLK: R19.2 S2.1 U6.20 | length 2105.9
  Top Layer w10: U6.20 1360.16,664.84 1435,590 2035.43,590 R19.2
  Bottom Layer w10: v1(115,710) 190,635 v1(1390,635)
SWDIO: R20.2 S1.2 U6.19 | length 2109.1
  Top Layer w10: U6.19 1334.57,655.43 1416,574 1896.06,574 1965,505.06 R20.2
  Bottom Layer w10: v1(115,535) 195,615 1375,615 v1(1390,600)
USB_DM: R20.1 U2.3 U5.6 | length 593
  Top Layer w10: U5.6@1625,534.49 U5.6 1625,500 1710.43,414.57 R20.1@1955,414.57 ; R20.1 2139.73,414.57 U2.3
USB_DP: R19.1 U2.1 U5.5 | length 662.6
  Top Layer w10: U5.5@1675,534.49 U5.5 1675,480 1705,450 2010,450 2062.4,502.4 U2.1@2145,502.4 ; R19.1 2142.84,504.57 cw(c2142.84,502.4) U2.1@2145,502.4 ; U2.1 U2.1@2145,502.4
VDDA: C13.2 R15.2 U6.5 | length 332.4
  Top Layer w10: U6.5 1257.8,912.2 1267.19,902.81 1432.62,902.81 R15.2 C13.2
pads on no net: BT1. P1.4 P1.MH1 P1.MH2 S1.0 S1.3 S1.4 S2.0 S2.3 S2.4 S3.0 S3.3 S3.4 U1.4 U4.10 U4.11 U5.9 U5.10 U5.11 U5.12 U5.13 U5.14 U5.15 U7.11 U8.3

## Polygon pours and split planes (outlines as drawn)
GND on Top Layer "TL-GND" (solid, remove dead copper, pour order 21): 0,0 2676,0 2676,2037 0,2037
GND on Bottom Layer "BL-GND" (solid, remove dead copper, pour order 24): 0,0 2676,0 2676,2037 0,2037

## Keep-outs
Keep-Out Layer:
  lines w10: 245.48,-69.48 246,-70 ; 2296,0 2312.41,0 2312.41,-68.59 2312.41,-70 2431,-70 2431,0 2676,0 2676,2037 0,2037 0,0 245.48,0 245.48,-70 363.59,-70 363.59,0 501,0 2301,0

## Other copper
Top Layer:
  rectangle net -25V: 1780,890 2015,945
  rectangle net -25V: 1905,645 1975,760
  rectangle net -25V: 1860,645 1930,930
  rectangle net -25V: 1860,890 2000,930
  rectangle net -25V: 1865,795 1925,875
  rectangle net NetD1_2: 1515,680 1675,845
  rectangle net NetD1_2: 1630,680 1775,775
  rectangle net NetD1_2: 1760,680 1780,850
  rectangle net NetR12_2: 1710,985 1780,1075
  rectangle net NetR12_2: 1700,795 1740,1155
  rectangle net 5V: 1810,990 1830,1105
  rectangle net 5V: 1780,1095 1880,1230
  rectangle net 5V: 1815,1180 2130,1225
  rectangle net 5V: 2030,1180 2535,1255
  rectangle net NetC25_1: 2445,885 2485,985
  rectangle net NetC25_1: 2335,945 2495,1000
  rectangle net -25V: 2375,805 2495,850
  rectangle net -25V: 2370,775 2415,905
  rectangle net NetC24_2: 2295,775 2350,890
  rectangle net NetC24_2: 2220,850 2345,910
  rectangle net GND: 2170,775 2270,830
  rectangle net NetC24_2: 2215,855 2275,970
  rectangle net NetC23_1: 2030,940 2085,975
  rectangle net NetC23_1: 1945,965 2085,1010
  rectangle net GND: 1945,775 2200,870
  rectangle net GND: 2175,785 2205,1000
  rectangle net -25V: 1975,905 2165,930
  rectangle net NetC23_2: 1945,1020 2275,1130
  rectangle net GND: 2290,980 2320,1155
  rectangle net GND: 2115,980 2320,1010
  rectangle net 5V: 2345,1025 2535,1250
  pour cut-out: 2530,1265 1765,1265 1650,1150 1650,885 1635,870 1510,870 1510,641.68 1721.85,628.27 2015,640 2015,715 2019.98,719.61 2012.59,712.77 2106.25,712.77 2224.84,711.94 2366.94,711.94 2530,875
Bottom Layer:
  rectangle net -25V: 1855,800 1905,925
  rectangle net -25V: 1775,895 1895,940
  rectangle net GND: 2150,1820 2260,1870

## Silkscreen, mask and mechanical layers (free items; w line width, h text height)
Top Overlay:
  text "Electrostatic Sensitive Device" at 420,1500 h25
  text "RESET" at 480,1250 h28
  text "By MartianZ" at 680,1040 h40
Bottom Overlay:
  rectangle: 450,195 2230,415
  text "Paste double-sided adhesive here" at 2220,425 h35

## Text inside footprints (layer, text, board x,y; h text height)
P1: Mechanical 1 "PCB Edge" at 2707.02,306.09 h9.84 r90